# Altium PCB Mopq.PcbDoc (part 1 of 2)
Units mil, origin at the board's own origin, x right, y up, seen from the top; angles counter-clockwise.
Board outline 3099.85 x 1000 mil, 4 copper layers (TOP, SIG, VSS, BOT), stack 31.6 mil thick; 76 components, 92 nets, 477 pads, 380 vias.
Unrouted connection lines stored in the file: 14.
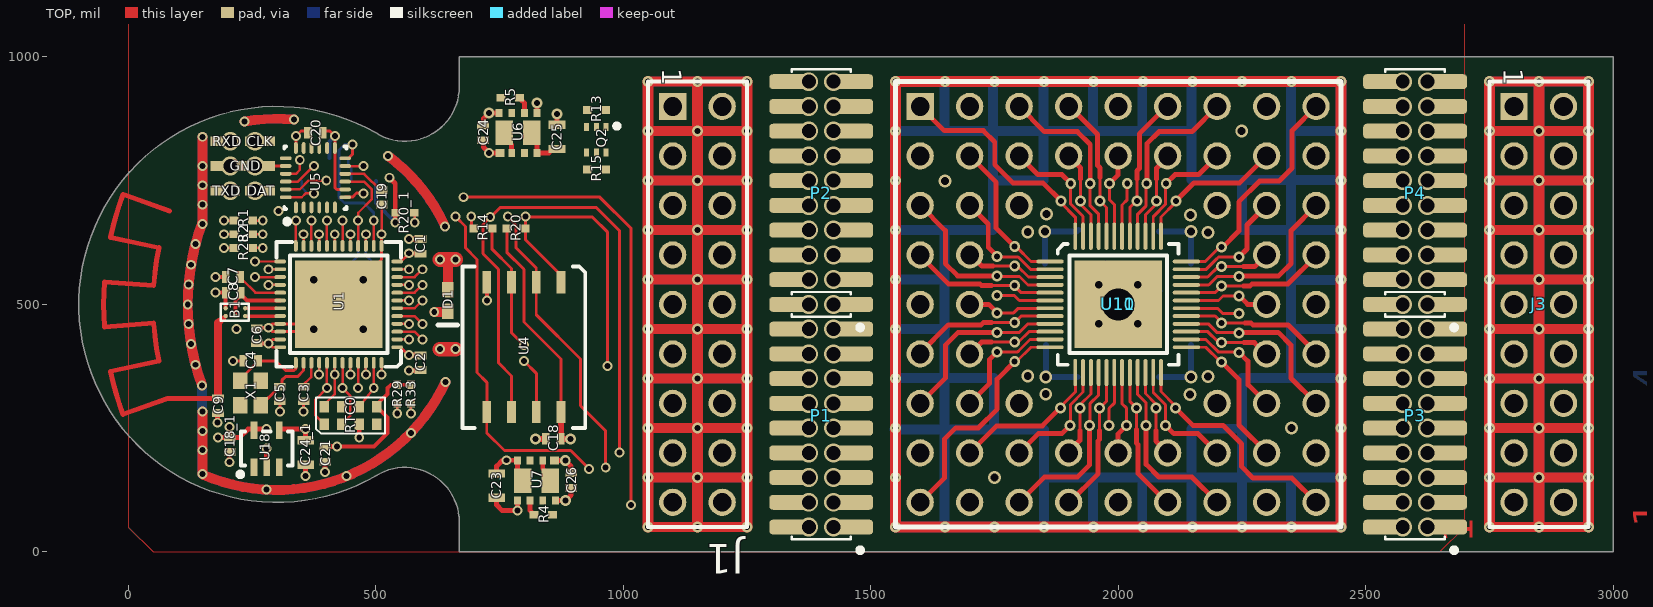
[diagram p0: TOP view]
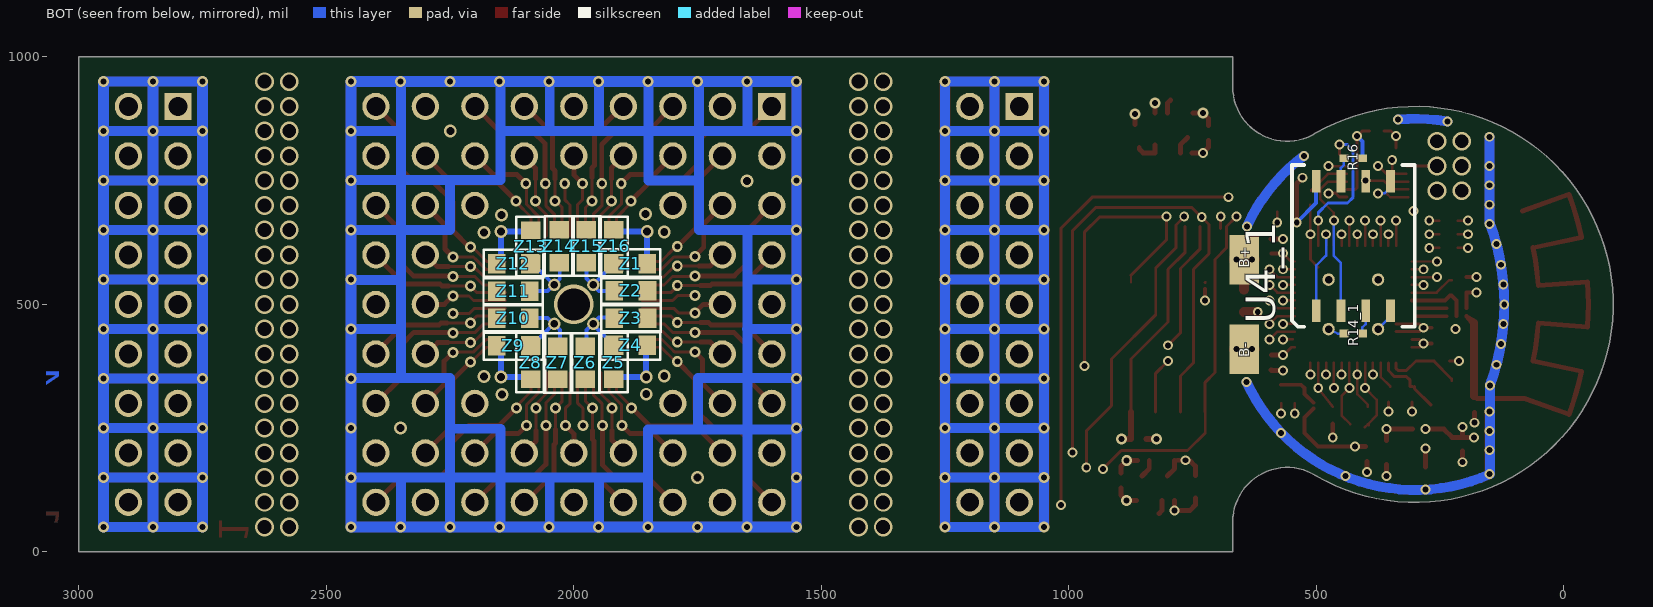
[diagram p1: BOT view, seen from below]
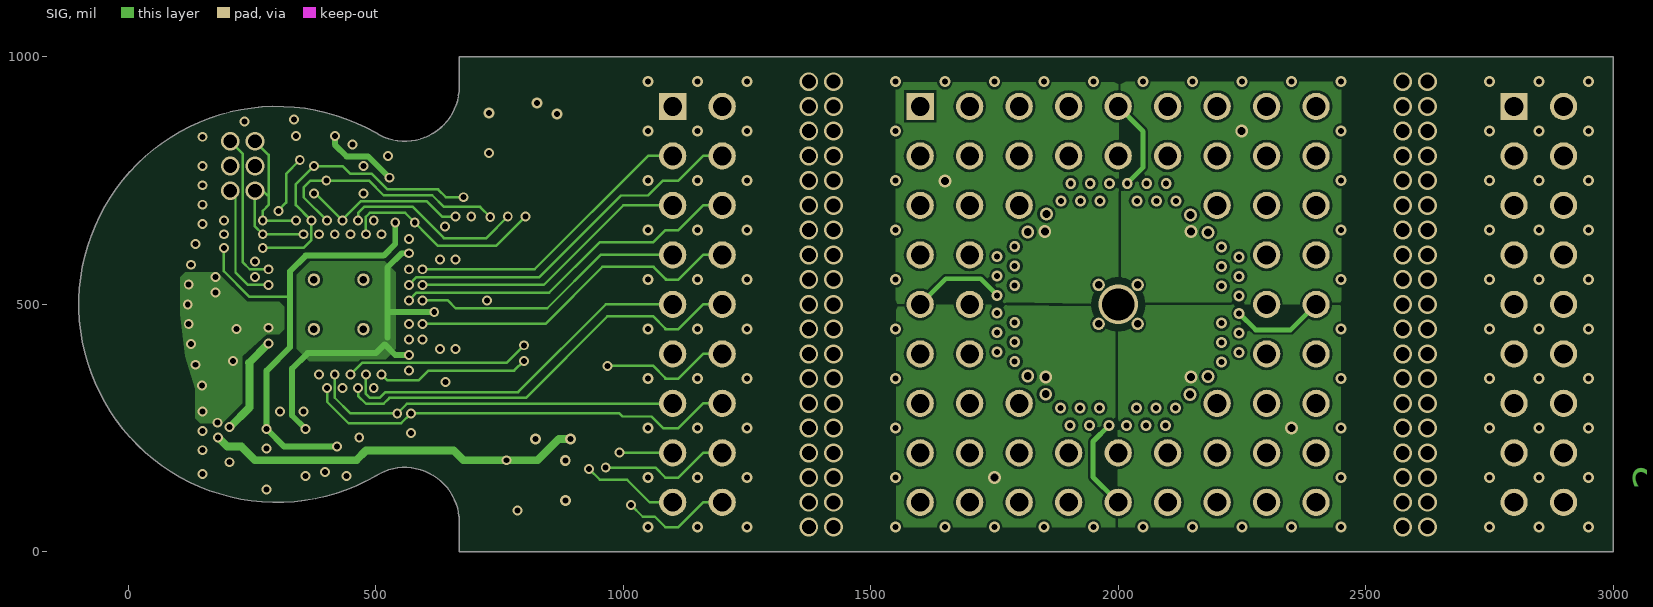
[diagram p2: SIG]
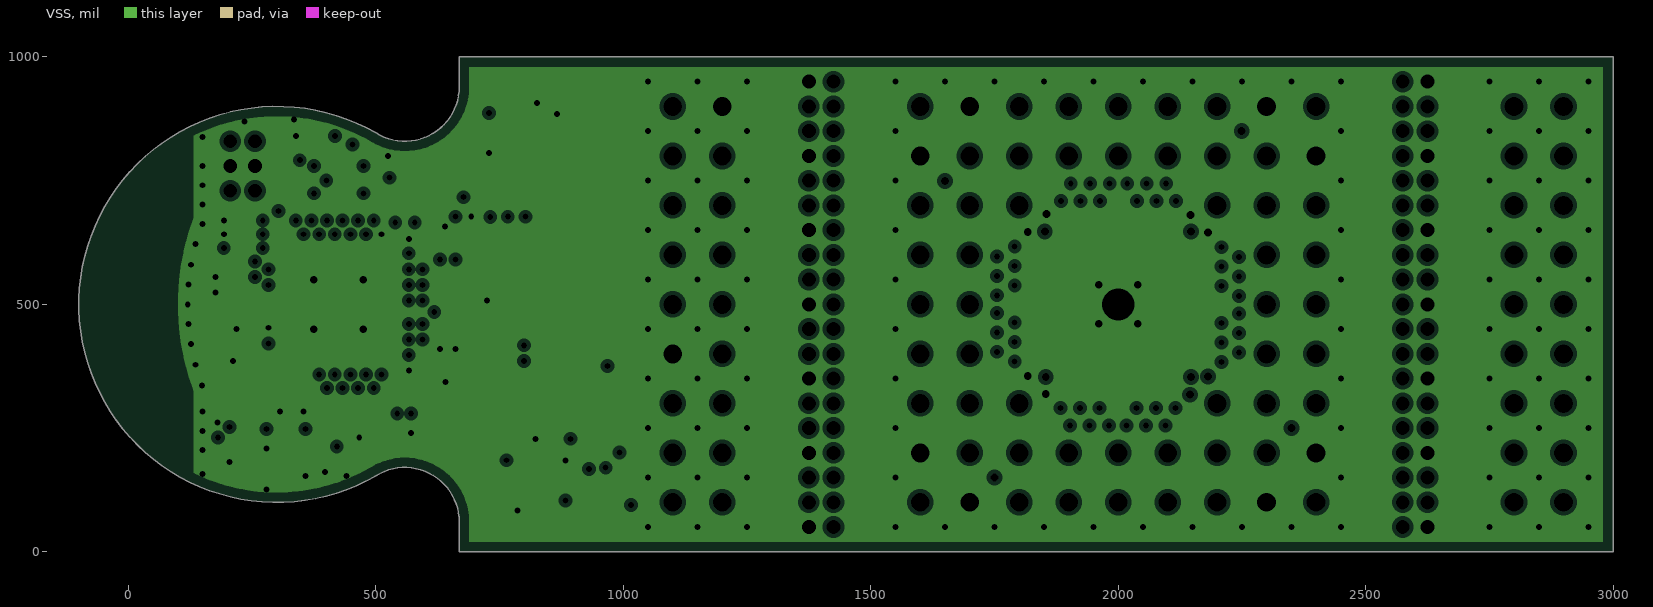
[diagram p3: VSS, clearances drawn from the general rule]
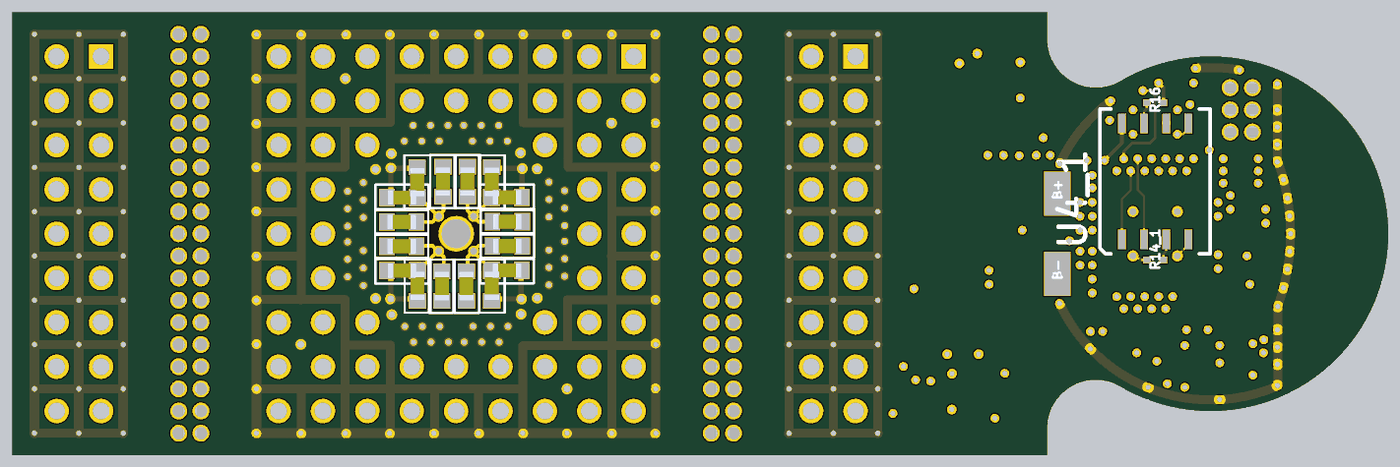
[diagram p5: 3D render of the assembled board from below, using the file's embedded part models]

## Layer stack, top to bottom
TOP: signal copper 1.4
Dielectric: prepreg 6, FR-4, Dk 4.8
SIG: signal copper 1.4
Dielectric: core 14, FR-4, Dk 4.8
VSS: plane copper 1.4, net GND
Dielectric: prepreg 6, FR-4, Dk 4.8
BOT: signal copper 1.4

## Board outline
668.62,0 668.62,60.01 ccw(c558.65,60.56) 500,153.59 cw(c300,500) 500,846.41 ccw(c558.65,939.44) 668.62,939.99 668.62,1000 3000,1000 3000,0

## Design rules (kind name [scope] priority, off if disabled: settings)
Clearance "Top Polygon" [(InPolygon)] p1: gap=5
Clearance [All] p2: gap=3
ComponentClearance [All] p1: gap=5 collisioncheckmode=3 verticalgap=5 showdistances=FALSE
FabricationTestPointUsage TestPointUsage [All] p1: valid=0 allowmultiple=FALSE
FabricationTestpoint Testpoint [All] p1: side=3 testpointundercomponent=TRUE minsize=40 maxsize=100 preferedsize=60 minholesize=0 maxholesize=40 preferedholesize=32 testpointgrid=1 allowsidetop=TRUE allowsidebottom=TRUE usegrid=TRUE gridtolerance=0.01
HoleSize [All] p1: absolutevalues=TRUE maxlimit=250 minlimit=3 maxpercent=80.000 minpercent=20.000
MinimumAnnularRing [All] p1: minimumring=2
PasteMaskExpansion [All] p1: expansion=-1
PlaneClearance [All] p1: clearance=8
PlaneConnect [All] p1: planeconnectstyle=Direct reliefexpansion=25 reliefentries=4 reliefconductorwidth=20 reliefairgap=10
PolygonConnect [All] p1: connectstyle=Direct reliefconductorwidth=15 reliefentries=4 polygonreliefangle="45 Angle"
RoutingLayers [All] p1: top layer_v5=TRUE mid layer 2_v5=FALSE bottom layer_v5=TRUE
RoutingVias [All] p1: holewidth=12 width=22 viastyle="Through Hole" minholewidth=3 minwidth=8 maxholewidth=65 maxwidth=100
SilkscreenOverComponentPads [All] p1: minsilkscreentomaskgap=10
SolderMaskExpansion [All] p1: expansion=3
Width [All] p1: maxlimit=200 minlimit=3 preferedwidth=10 toplayer_maxwidth=100 midlayer2_maxwidth=100 minimp=50.000000 maximp=50.000000 favimp=50.000000
19 further rules are at their usual default settings.

## Classes and differential pairs
component class Mopb: * ID1
component class Memory: C18 R14 R20 U4
component class "Power Conversion": C23 C24 C25 C26 Q2 R4 R5 R13 R15 U6 U7

## Components (designator, comment, footprint, x,y, rotation, side; value= is the part's Value field where it differs from the comment)
B1 "BAL-NRF02D3" BAL-ST-WLCSP 216.34,484.25 r180 top locked
B+ "5016" TP0875x050#1 651.97,578.15 r180 bottom
B- "5016" TP0875x050#2 651.97,417.91 r90 bottom
C1 "0.1u" CAP0402 590.35,617.13 r270 top
C2 "0.1u" CAP0402 590.35,381.89 r90 top
C3 "0.1u" CAP0402 354.13,318.9 r90 top
C4 "27p" CAP0402 247.09,385.83 r0 top
C5 "27p" CAP0402 306.14,318.9 r90 top
C6 "1000p" CAP0402 259.65,437.01 r270 top
C7 "0.047u" CAP0402 211.42,555.12 r0 top
C8 "2200p" CAP0402 212.4,523.62 r0 top
C9 "1.0p" CAP0402 181.1,295.28 r90 top
C18 "0.1u" CAP0402 858.27,228.35 r0 top
C18_1 "0.1u" CAP0402 204.72,216.54 r90 top (schematic designator C18)
C19 "0.1u" CAP0402 511.81,716.54 r90 top
C20 "10nF" CAP0402 377.95,846.46 r0 top
C21 "0.1u" CAP0402 397.64,196.85 r90 top
C23 "10u" CAP0603 744.09,133.86 r90 top
C24 "4.7u" CAP0402 716.54,846.46 r90 top
C24_1 "4.7u" CAP0603 358.27,200.79 r90 top (schematic designator C24)
C25 "22u" CAP0603 866.14,838.58 r270 top
C26 "4.7u" CAP0402 894.65,143.98 r270 top
CLK "5016" TP0875x050#3 265.91,829.53 r90 top
D1 "1PS79SB31" SOD-523 645.67,507.87 r90 top
DAT "5016" TP0875x050#4 255.91,729.53 r180 top
GND "5016" TP0875x050#5 230.91,779.53 r90 top
J1 "HDR2.54-2x9SM" HDR2.54-2X9 1150,500 r270 top locked
J3 "HDR2.54-2x9SM" HDR2.54-2X9 2850,500 r270 top locked (schematic designator J1)
P1 "HDR" HDR1.27-2X10-SMD-R 1400,275 r90 top
P2 "HDR" HDR1.27-2X10-SMD-R 1400,725 r90 top
P3 "HDR" HDR1.27-2X10-SMD-R 2600,275 r90 top
P4 "HDR" HDR1.27-2X10-SMD-R 2600,725 r90 top
Q2 "SSM6N42FE" ES6 945.79,832.68 r180 top
R1 "12k" RES0402 232.28,669.29 r180 top
R2 "12k" RES0402 232.28,641.73 r180 top
R4 "100k" RES0402 838.58,74.8 r0 top
R5 "100k" RES0402 771.65,917.32 r0 top
R13 "100k" RES0402 945.79,892.68 r0 top
R14 "100k" RES0402 716.54,653.54 r0 top
R14_1 "100k" RES0402 425.2,440.94 r180 bottom (schematic designator R14)
R15 "100k" RES0402 945.79,772.68 r0 top
R16 "100k" RES0402 425.2,795.28 r180 bottom
R20 "100k" RES0402 783.46,653.54 r0 top
R20_1 "100k" RES0402 559.06,685.04 r0 top (schematic designator R20)
R28 "100k" RES0402 232.28,614.17 r180 top
R29 "100k" RES0402 543.31,318.9 r90 top
R33 "100k" RES0402 570.87,318.9 r90 top
RTC0 "AB-RTCMC-32.768kHz-AIGZ" 8-CLCC 448.82,275.59 r0 top
RXD "5016" TP0875x050#3 195.91,829.53 r90 top
TXD "5016" TP0875x050#3 195.91,729.53 r90 top
U1 "nRF51822-QF" VQFN40P600X600X100-48 425,500 r180 top locked
U4 "MX25U12835F" "WSON 8L" 799.21,413.39 r270 top locked
U4_1 "MX25U12835F" "WSON 8L" 425,618.11 r90 bottom (schematic designator U4)
U5 "InvenSense MPU-6500" QFN-24 377.95,755.9 r90 top locked
U6 "XCL209B303DR" USP-10B03 787.4,846.46 r90 top
U7 "XCL209B183DR" USP-10B03 824.57,143.9 r270 top
U10 "EM351" PGA60x9 1600,900 r0 top locked
U11 "EM351" TQFP40P800X800X120-48N 2000,500 r0 top
U18 "TPS79718" SOT65P212X110-5N 279.53,208.66 r90 top locked
X1 "ILCX19" ILCX19 211.65,362.2 r270 top
Z1 "Inductor" 603 1885.07,582.17 r0 bottom
Z2 "Inductor" 603 1884.6,527.17 r0 bottom
Z3 "Inductor" 603 1884.6,472.17 r0 bottom
Z4 "Inductor" 603 1885.07,417.17 r0 bottom
Z5 "Inductor" 603 1919.6,382.17 r90 bottom
Z6 "Inductor" 603 1977.06,381.7 r90 bottom
Z7 "Inductor" 603 2032.06,381.7 r90 bottom
Z8 "Inductor" 603 2087.06,382.17 r90 bottom
Z9 "Inductor" 603 2122.06,416.7 r180 bottom
Z10 "Inductor" 603 2122.54,471.7 r180 bottom
Z11 "Inductor" 603 2122.54,526.7 r180 bottom
Z12 "Inductor" 603 2122.06,581.7 r180 bottom
Z13 "Inductor" 603 2087.54,616.7 r270 bottom
Z14 "Inductor" 603 2029.6,617.65 r270 bottom
Z15 "Inductor" 603 1974.6,617.65 r270 bottom
Z16 "Inductor" 603 1919.6,617.17 r270 bottom

## Footprints (in the part's own frame and the unit in brackets; to place one, negate y for a bottom-side part, rotate by r counter-clockwise, add the part's x,y. Pads: shape width x height; smd on the part's side, far side on the other; paste and mask are expansions set on the pad)
8-CLCC [mm] "8 lead CLCC package, 2.3 x 1.5mm"
  rect 0.5x0.6 smd: 1(-1.35,-0.45) 2(-0.45,-0.45) 3(0.45,-0.45) 4(1.35,-0.45) 5(1.35,0.45) 6(0.45,0.45) 7(-0.45,0.45) 8(-1.35,0.45)
  silkscreen extent -1.78,-0.92 1.78,0.92, body extent -1.6,-0.75 1.6,0.75, height 0.8
603 [mm]
  rect 0.9x1 smd: 1(-0.85,0) 2(0.85,0)
  silkscreen extent -1.52,-0.74 1.52,0.74, body extent -0.81,-0.41 0.81,0.41, height 0.47
BAL-ST-WLCSP [mm]
  round 0.22 smd mask+0.05: A1(0.5,0.2) A2(0,0.2) A3(-0.5,0.2) B1(0.5,-0.2) B3(-0.5,-0.2)
  TOP pour cut-out: -0.697,-0.43 0.756,-0.43 0.756,0.44 -0.697,0.44
  silkscreen extent -0.69,-0.43 0.76,0.43, body extent -0.7,-0.43 0.76,0.43, height 0.63
CAP0402 [mm] "Chip Capacitor, 2-Leads, Body 0402 / 0.10x0.50mm, IPC High Density"
  rect 0.4x0.6 smd: 1(-0.375,0) 2(0.375,0)
  body extent -0.53,-0.28 0.53,0.28, height 0.55
CAP0603 [mm] "Chip Capacitor, 2-Leads, Body 0603 / 1.60x0.8mm, IPC High Density"
  rect 0.425x0.85 smd: 1(-0.625,0) 2(0.625,0)
  body extent -0.8,-0.4 0.8,0.4, height 0.8
ES6 [mm] "SOT-563 6-pin 1.6x1.6x0.55mm"
  rect 0.25x0.4 smd: 1(-0.5,-0.65) 2(0,-0.65) 3(0.5,-0.65) 4(0.5,0.65) 5(0,0.65) 6(-0.5,0.65)
  silkscreen extent -1.16,-0.81 -0.94,-0.59, body extent -0.8,-0.6 0.8,0.6, height 0.55
HDR1.27-2X10-SMD-R [mil] "CONN, HDR, 20POS, 2ROW, 50MIL, POLARIZED, SMD, RECEPTACLE"
  rrect50% 30x90 smd: 1(-225,-60) 2(-225,60) 3(-175,-60) 4(-175,60) 5(-125,-60) 6(-125,60) 7(-75,-60) 8(-75,60) 9(-25,-60) 10(-25,60) 11(25,-60) 12(25,60) 13(75,-60) 14(75,60) 15(125,-60) 16(125,60) 17(175,-60) 18(175,60) 19(225,-60) 20(225,60)
  silkscreen extent -277,-84 250,60
HDR2.54-2X9 [mil] "Connector; Header; 2x9 Position"
  rect 55x55 hole 38: 1(-400,-50)
  round 55 hole 38: 2(-400,50) 3(-300,-50) 4(-300,50) 5(-200,-50) 6(-200,50) 7(-100,-50) 8(-100,50) 9(0,-50) 10(0,50) 11(100,-50) 12(100,50) 13(200,-50) 14(200,50) 15(300,-50) 16(300,50) 17(400,-50) 18(400,50)
  silkscreen extent -450,-100 450,100
ILCX19 [mm] "ILSI ILCX19 Crystal Oscillator 2.0 x 1.6 x 0.45mm"
  rect 0.85x0.75 smd: 1(0.425,0.375) 2(1.675,0.375) 3(1.675,1.425) 4(0.425,1.425)
  body extent 0.05,0.1 2.05,1.7, height 0.45
PGA60x9 [mil]
  rect 55x55 hole 38: A1(0,0)
  round 55 hole 38: A2(100,0) A3(200,0) A4(300,0) A5(400,0) A6(500,0) A7(600,0) A8(700,0) A9(800,0) B1(0,-100) B2(100,-100) B3(200,-100) B4(300,-100) B5(400,-100) B6(500,-100) B7(600,-100) B8(700,-100) B9(800,-100) C1(0,-200) C2(100,-200) C3(200,-200) C7(600,-200) C8(700,-200) C9(800,-200) D1(0,-300) D2(100,-300) D8(700,-300) D9(800,-300) E1(0,-400) E2(100,-400) E8(700,-400) E9(800,-400) F1(0,-500) F2(100,-500) F8(700,-500) F9(800,-500) G1(0,-600) G2(100,-600) G3(200,-600) G7(600,-600) G8(700,-600) G9(800,-600) H1(0,-700) H2(100,-700) H3(200,-700) H4(300,-700) H5(400,-700) H6(500,-700) H7(600,-700) H8(700,-700) H9(800,-700) J1(0,-800) J2(100,-800) J3(200,-800) J4(300,-800) J5(400,-800) J6(500,-800) J7(600,-800) J8(700,-800) J9(800,-800)
  silkscreen extent -50,-850 850,50
QFN-24 [mm]
  oval 0.6x0.2 smd: 1(-1.525,1) 2(-1.525,0.6) 3(-1.525,0.2) 4(-1.525,-0.2) 5(-1.525,-0.6) 6(-1.525,-1) 13(1.525,-1) 14(1.525,-0.6) 15(1.525,-0.2) 16(1.525,0.2) 17(1.525,0.6) 18(1.525,1)
  oval 0.2x0.6 smd: 7(-1,-1.525) 8(-0.6,-1.525) 9(-0.2,-1.525) 10(0.2,-1.525) 11(0.6,-1.525) 12(1,-1.525) 19(1,1.525) 20(0.6,1.525) 21(0.2,1.525) 22(-0.2,1.525) 23(-0.6,1.525) 24(-1,1.525)
  TOP pour cut-out: -1.35,1.35 -1.35,-1.35 1.35,-1.35 1.35,1.35
  silkscreen extent -2.37,-1.6 1.6,1.6, body extent -1.45,-1.45 1.45,1.45, height 0.95
RES0402 [mm] "Chip resistor 0402 high density"
  rect 0.45x0.4 smd: 1(-0.475,0) 2(0.475,0)
  body extent -0.61,-0.2 0.6,0.2, height 0.5
SOD-523 [mm] "Diode small package"
  rect 0.8x0.6 smd: 1(0.55,0) 2(-0.55,0)
  silkscreen extent -1.25,-0.5 -1.25,0.5, body extent -1.12,-0.6 1.12,0.6, height 0.65
SOT65P212X110-5N [mm] "SOT23, 5-Leads, Body 2.3x2.3mm (max), Pitch 0.65mm, IPC Medium Density"
  rect 0.9x0.35 smd: 1(-0.95,0.65) 2(-0.95,0) 3(-0.95,-0.65) 4(0.95,-0.65) 5(0.95,0.65)
  silkscreen extent -1.45,-1.33 0.88,1.47, body extent -0.67,-1.12 0.67,1.13, height 1.1
TP0875x050#1 [mm] "Test Pad 0.875x0.50mm"
  rect 1.524x2.54 smd: 1(0.16,0.315)
TP0875x050#2 [mm] "Test Pad 0.875x0.50mm"
  rect 2.54x1.524 smd: 1(-0.215,-0.16)
TP0875x050#3 [mm] "Test Pad 0.875x0.50mm"
  rect 0.508x1.524 smd: 1(0,0)
TP0875x050#4 [mm] "Test Pad 0.875x0.50mm"
  rect 1.524x0.508 smd: 1(-0.254,0)
TP0875x050#5 [mm] "Test Pad 0.875x0.50mm"
  rect 0.508x3.302 smd: 1(0,0)
TQFP40P800X800X120-48N [mm]
  round 0.635 hole 0.381: 0(-1,-1) 0(-1,1) 0(1,-1) 0(1,1)
  rect 4.5x4.5 smd: 0(0,0)
  oval 1.4x0.2 smd: 1(-3.5,2.2) 2(-3.5,1.8) 3(-3.5,1.4) 4(-3.5,1) 5(-3.5,0.6) 6(-3.5,0.2) 7(-3.5,-0.2) 8(-3.5,-0.6) 9(-3.5,-1) 10(-3.5,-1.4) 11(-3.5,-1.8) 12(-3.5,-2.2) 25(3.5,-2.2) 26(3.5,-1.8) 27(3.5,-1.4) 28(3.5,-1) 29(3.5,-0.6) 30(3.5,-0.2) 31(3.5,0.2) 32(3.5,0.6) 33(3.5,1) 34(3.5,1.4) 35(3.5,1.8) 36(3.5,2.2)
  oval 0.2x1.4 smd: 13(-2.2,-3.5) 14(-1.8,-3.5) 15(-1.4,-3.5) 16(-1,-3.5) 17(-0.6,-3.5) 18(-0.2,-3.5) 19(0.2,-3.5) 20(0.6,-3.5) 21(1,-3.5) 22(1.4,-3.5) 23(1.8,-3.5) 24(2.2,-3.5) 37(2.2,3.5) 38(1.8,3.5) 39(1.4,3.5) 40(1,3.5) 41(0.6,3.5) 42(0.2,3.5) 43(-0.2,3.5) 44(-0.6,3.5) 45(-1,3.5) 46(-1.4,3.5) 47(-1.8,3.5) 48(-2.2,3.5)
  silkscreen extent -3.1,-3.1 3.1,3.1
USP-10B03 [mm] "10-pin QFN 2.5 x2.15x1.0mm"
  rect 0.4x0.45 smd mask+0.08: 1(-1.025,0.925)
  rect 0.4x0.35 smd mask+0.08: 2(-1.025,0.325) 3(-1.025,-0.325) 4(-1.025,-0.975) 5(1.025,-0.975) 6(1.025,-0.325) 7(1.025,0.325) 8(1.025,0.975)
  rect 1.25x0.9 smd mask+0.08: 9(0,0.7) 10(0,-0.7)
  body extent -1.1,-1.28 1.1,1.27, height 1.05
VQFN40P600X600X100-48 [mm]
  round 0.635 hole 0.381: 0(-1.27,1.27) 0(-1.27,-1.27) 0(1.27,1.27) 0(1.27,-1.27)
  rect 4.5x4.5 smd: 0(0,0)
  oval 0.6x0.2 smd: 1(-3,2.2) 2(-3,1.8) 3(-3,1.4) 4(-3,1) 5(-3,0.6) 6(-3,0.2) 7(-3,-0.2) 8(-3,-0.6) 9(-3,-1) 10(-3,-1.4) 11(-3,-1.8) 12(-3,-2.2) 25(3,-2.2) 26(3,-1.8) 27(3,-1.4) 28(3,-1) 29(3,-0.6) 30(3,-0.2) 31(3,0.2) 32(3,0.6) 33(3,1) 34(3,1.4) 35(3,1.8) 36(3,2.2)
  oval 0.2x0.6 smd: 13(-2.2,-3) 14(-1.8,-3) 15(-1.4,-3) 16(-1,-3) 17(-0.6,-3) 18(-0.2,-3) 19(0.2,-3) 20(0.6,-3) 21(1,-3) 22(1.4,-3) 23(1.8,-3) 24(2.2,-3) 37(2.2,3) 38(1.8,3) 39(1.4,3) 40(1,3) 41(0.6,3) 42(0.2,3) 43(-0.2,3) 44(-0.6,3) 45(-1,3) 46(-1.4,3) 47(-1.8,3) 48(-2.2,3)
  silkscreen extent -3.2,-3.2 3.2,3.2
"WSON 8L" [mm] "WSON 8L 8x6x0.8mm"
  rect 1.15x0.45 smd: 1(-3.325,1.905) 2(-3.325,0.635) 3(-3.325,-0.635) 4(-3.325,-1.905) 5(3.325,-1.905) 6(3.325,-0.635) 7(3.325,0.635) 8(3.325,1.905)
  silkscreen extent -4.15,-3.15 4.15,3.15, body extent -4,-3 4,3, height 0.8

## Part data
B1: library part BAL-ST-5pin_DC-Flip, "50 ohm balun transformer for 2.45GHz ISM"
B+ B- CLK DAT GND RXD TXD: "Single-pad test point"
C1 C2 C3 C19 C21: library part C_0.1u_10_10_X5R_0201, "Chip capacitor"
C4 C5: library part C_27p_5_50_C0G_0201, "Chip capacitor"
C6: library part C_1000p_10_25_X7R_0201, "Chip capacitor"
C7: library part C_0.047u_10_16_X7R_0402, "Chip capacitor"
C8 C9: library part C_2200p_5_16_STD_0402, "Chip capacitor"
C18 C18_1: library part C_0.1u_10_6.3_X5R_0201, "Chip capacitor"
C20: library part CAP0201, "Chip capacitor"
C23: library part C_10u_10_6.3_X5R_0603, "Chip capacitor"
C24 C24_1 C26: library part C_4.7u_10_10_JB_0402, "Chip capacitor"
C25: library part C_22u_10_20_JB_0603, "Chip capacitor"
D1: "Schottky diode, 30V 200mA"
Q2: "Toshiba Dual N-Channel MOSFET 1.5v drive 20V 800ma"
R1 R2: library part R_12k_0.5_0.063_0402, "Chip Resistor"
R4 R5 R13 R14 R14_1 R15 R16 R20 R20_1 R28 R29 R33: library part R_100k_5_0.05_0201, "Chip Resistor"
RTC0: "Abracon I2C RTC w/ integrated XO"
U1: library part nRF51822_QF, "Multi-protocol Bluetooth Low Energy and 2.4GHz proprietary system-on-chip"
U4 U4_1: "Macronix MX25U12835F SPI NOR Flash"
U5: library part MPU-6500, "InvenSense MPU-6500 6-axis accelerometer and gyroscope"
U6 U7: library part XCL208, "Torex micro DC-DC Converter"
U10: library part EM350
U18: library part TPS79718DCK, "LDO 1.8V SC70-5"
X1: "ILSI ILCX19 Crystal Oscillator"
Z1 Z2 Z3 Z4 Z5 Z6 Z7 Z8 Z9 Z10 Z11 Z12 Z13 Z14 Z15 Z16: library part 210-00031

## Via types
v1: diameter 22, hole 12, TOP to BOT, tented both sides, 144 vias
v2: diameter 20, hole 12, TOP to BOT, 130 vias
v3: diameter 38, hole 28, TOP to BOT, 82 vias
v4: diameter 26, hole 16, TOP to BOT, tented both sides, 16 vias
v5: diameter 22, hole 12, TOP to BOT, 7 vias
v6: diameter 80, hole 65, TOP to BOT, 1 vias

## Nets (pads, with @x,y where several pads share a name; then routed paths per layer and width w, separated by ;. In a path a pad name is that pad's centre, name@x,y a point inside that pad or via, vN(x,y) a via of type N, cw(c..) or ccw(c..) an arc to the next point about the centre after c; other vN are vias at no path point)
1V8: C6.2 C18.2 C18_1.2 C23.2 R20.1 U1.35 U1.36 U4.8 U7.4 U7.10 | length 1690.4
  TOP w6: U1.36@306.89,413.39 291.14,413.39 v2(283.27,421.26) 291.14,429.13 U1.35@306.89,429.13 ; R20.1@764.76,657.48 764.76,605.32 799.21,570.87 799.21,464.57 874.21,389.57 U4.8@874.21,282.48
  TOP w7.87: C6.2@266.54,421.26 v2(283.27,421.26)
  TOP w10: v2(181.1,231.3) 225.39,231.3 ; C18_1.2@204.72,235.24 v2(204.72,251.97) ; C23.2@744.09,154.53 744.09,173.23 755.91,185.04 v2(763.78,185.04) U7.4@779.92,185.04 ; U7.4@786.18,184.25 786.18,167.83 U7.10@800.94,153.07
  TOP w12: C18.2@874.02,228.35 C18.2@874.21,228.35 ; U4.8@874.21,282.48 C18.2@874.21,228.35 ; v5(893.7,228.35) C18.2@874.21,228.35
  SIG w16: v2(181.1,231.3) 199.8,212.6 228.35,212.6 255.91,185.04 460.63,185.04 480.32,204.72 657.48,204.72 677.17,185.04 v2(763.78,185.04) 826.77,185.04 870.08,228.35 v5(893.7,228.35) ; v2(204.72,251.97) 244.59,291.83 244.59,382.09 ; 244.09,382.09 v2(283.27,421.26)
  other v4: 1851.77,647.24 1650,749.61
1V8_EN: R4.1 U1.3 U7.6 | length 86.4
  TOP w5: U1.3@543.11,444.88 578.54,444.88 v2(594.29,429.13)
  TOP w10: U7.6@811.77,103.54 811.77,83.27 R4.1@817.76,77.28
3V3: C25.2 U6.4 U6.10 | length 54.4
  TOP w10: U6.10@825.79,822.52 U6.4@825.79,806.1 849.8,806.1 857.6,813.9 C25.2@857.6,816.85
  other v4: 1750,150 1853.74,352.95
3V3_EN: R5.2 U1.11 U6.6 | length 52.4
  TOP w5: U1.11@543.11,570.87 v2(566.73,570.87)
  TOP w10: R5.2@794.21,913.07 800.2,907.09 U6.6@800.2,886.81
AD_ENABLE: 
AD_GATE: 
ADS_CTL1: 
ADS_CTL2: 
ADS_MOSI: 
ADS_SCLK: 
AIN0: J1.10 U1.45 | length 912.7
  TOP w5: v2(464.37,330.71) U1.45@464.37,381.89
  SIG w5: v2(464.37,330.71) 464.37,315.16 480.31,299.21 515.75,299.21 527.56,311.02 803.15,311.02 967.76,475.63 1060.91,475.63 1084.92,451.61 ; 1084.92,450 1111.42,450 1161.42,500 J1.10@1200,500
AIN1: J1.9 U1.46 | length 804.3
  TOP w5: v2(480.12,358.27) U1.46@480.12,381.89
  SIG w5: v2(480.12,358.27) 480.12,319.09 488.19,311.02 507.87,311.02 519.68,322.83 787.4,322.83 964.57,500 J1.9@1100,500 1060,500
AIN2: J1.8 U1.5 | length 741.7
  TOP w5: U1.5@543.11,476.38 578.54,476.38 v2(594.29,460.63)
  SIG w5: v2(594.29,460.63) 842.52,460.63 957.52,575.63 1061.42,575.63 1085.43,551.61 ; 1085.43,550 1111.42,550 1161.42,600 J1.8@1200,600
AIN3: J1.7 U1.6 | length 614.6
  TOP w5: U1.6@543.11,492.13 578.54,492.13 v2(594.29,507.87)
  SIG w5: v2(594.29,507.87) 645.67,507.87 661.42,492.13 846.46,492.13 954.33,600 J1.7@1100,600
AIN4: J1.6 U1.7 | length 736.5
  TOP w5: U1.7@543.11,507.87 v2(566.73,507.87)
  SIG w5: v2(566.73,507.87) 582.48,523.62 850.39,523.62 952.76,625.98 1060.98,625.98 1085,650 1111.42,650 1161.42,700 J1.6@1200,700
AIN5: J1.5 U1.8 | length 809.4
  TOP w5: U1.8@543.11,523.62 578.54,523.62 v2(594.29,539.37)
  SIG w5: 688.78,539.37 v2(594.29,539.37) 839.37,539.37 1000,700 J1.5@1100,700 1015,700
AIN6: J1.4 U1.9 | length 859.3
  TOP w5: U1.9@543.11,539.37 v2(566.73,539.37)
  SIG w5: v2(566.73,539.37) 582.48,555.12 ; 676.97,555.12 582.48,555.12 ; J1.4@1200,800 1161.42,800 1111.42,750 1080,750 1050,720 995.59,720 830.71,555.12 582.48,555.12
AIN7: J1.3 U1.10 | length 787.8
  TOP w5: U1.10@543.11,555.12 578.54,555.12 v2(594.29,570.87)
  SIG w5: 688.78,570.87 v2(594.29,570.87) 820.87,570.87 1050,800 J1.3@1100,800 1065,800
ANT1: B1.B3 U1.31 | length 63
  TOP w7: B1.B3@236.02,492.13 U1.31@299.02,492.13
ANT2: B1.A3 U1.32 | length 63
  TOP w7: B1.A3@236.02,476.38 U1.32@299.02,476.38
AUX_SCL: U5.7 | length 40.5
  TOP w6: U5.7@437.99,716.53 452.76,716.53 461.22,725 v2@475,725
  other v2: 475,724.41
AUX_SDA: U5.21 | length 171
  TOP w5: U5.21@317.91,763.78 338.58,763.78 346.46,771.65 v2(346.46,791.34)
  SIG w5: v2@303.15,689.76 318.9,705.51 318.9,763.78 v2(346.46,791.34)
  other v2: 303.15,688.98
BATT: 
BGND: 
BLE_ANT: B1.A1 C9.2 | length 1300
  TOP w8: 181.47,467.94 B1.A1@196.65,476.38 185.83,462.6
  TOP w10: 51.31,462.02 -48.42,454.66 cw(c600,500) -48.42,545.34 51.31,537.98 ; 51.34,461.63 ccw(c600,500) 62.02,385.65 ; 51.34,538.37 cw(c600,500) 62.02,614.35 ; 62.05,385.49 -35.8,364.86 ccw(c600,500) -10.8,277.69 79.11,309.98 C9.2@174.93,309.98 ; 62.05,614.51 -35.8,635.14 cw(c600,500) -10.8,722.31 83.31,688.51
  TOP w16: C9.2@181.1,314.96 181.1,462.83
BLE_GND: 
DCC: U1.2 | length 19.7
  TOP w5: U1.2@547.05,429.13 v2(566.73,429.13)
DEC1: C3.2 U1.39 | length 56.3
  TOP w5: C3.2@350.2,333.66 369.63,353.09 ; 369.88,353.09 U1.39@369.88,381.89
DEC2: C7.2 U1.29 | length 91.3
  TOP w5: C7.2@226.18,549.21 231.1,549.21 256.69,523.62 U1.29@306.89,523.62
FLASH_CS: J1.12 R20.2 R20_1.2 U1.15 U4.1 U4_1.1 | length 1483.8
  TOP w5: U1.15@480.12,618.11 v2(480.12,641.73) ; U4.1@874.21,544.29 U4.1@874.21,558.86
  TOP w6: v2(578.74,665.35) R20_1.2@578.74,687.01 ; v2@802.17,676.67 937.5,676.67 968.5,645.67 v2@968.5,374.02 ; v2(802.17,677.17) 802.17,630.91 U4.1@874.21,558.86
  SIG w5: v2(480.12,641.73) 480.12,676.97 488.19,685.04 559.06,685.04 625.98,618.11 743.11,618.11 v2(802.17,677.17) ; v2(968.5,375.63) 1060.91,375.63 1084.92,351.61 ; 1084.92,350 1111.42,350 1161.42,400 J1.12@1200,400
  BOT w5: v2(480.12,641.73) 480.12,598.62 500,578.74 U4_1.1@500,500
FLASH_CS#: 
FLASH_NCS: 
FRST: R16.1 U1.48 U4.7 U4_1.7 | length 494.6
  TOP w5: v2(511.61,358.27) U1.48@511.61,381.89
  TOP w6: v2(799.21,385.83) 824.41,360.63 U4.7@824.41,282.68
  SIG w5: v2@511.81,358.27 523.62,346.46 586.61,346.46 606.3,366.14 779.53,366.14 v2(799.21,385.83)
  BOT w5: R16.1@443.9,795.28 443.9,781.69 450,775.59 U4_1.7@450,749.02
FSYNC: U5.11 | length 38.4
  TOP w5: U5.11@437.99,779.53 v2@476.38,779.53
  other v2: 475,779.53
FWPT: R14.2 R14_1.2 U1.44 U4.3 U4_1.3 | length 717
  TOP w5: v2(448.62,358.27) U1.44@448.62,381.89
  TOP w6: R14.2@735.24,657.48 735.24,611.22 774.21,572.24 U4.3@774.21,544.29 ; U4.3@774.02,544.09 774.02,442.52 v2(799.21,417.32)
  SIG w5: v2(448.62,358.27) 472.24,381.89 763.78,381.89 v2@801.18,419.29
  BOT w5: U4_1.3@400,487.2 400,460.24 406.5,453.74 R14_1.2@406.5,440.94
GAUGE_INT: 
GAUGE_SCL: 
GAUGE_SDA: 
GND: B1.B1 B-.1 C1.1 C2.1 C3.1 C4.1 C5.1 C6.1 C7.1 C8.1 C9.1 C18.1 C18_1.1 C19.1 C20.1 C21.1 C23.1 C24.1 C24_1.1 C25.1 C26.1 GND.1 J1.2 J1.11 Q2.1 Q2.4 R1.2 R2.2 R4.2 R5.1 R13.1 R14.1 R14_1.1 R15.1 RTC0.3 U1.0 U1.13 U1.33 U1.34 U4.4 U4_1.4 U5.18 U5.20 U6.1 U6.5 U7.1 U7.5 U10.A2 U10.A8 U10.B1 U10.B9 U10.H1 U10.H9 U10.J2 U10.J8 U11.0 U18.2 | length 36809.7
  TOP w5: v2(192.91,641.73) R2.2@213.58,641.73 ; v2(192.91,669.29) R1.2@213.58,669.29 ; v2@511.87,641.98 C19.1@511.87,701.77
  TOP w6: v2(211.65,385.83) C4.1@230.83,385.83 ; v3(255.91,779.53) U5.20@317.91,779.53 ; v2(306.14,283.46) C5.1@306.14,302.64 ; U1.0@338.39,444.88 U1.34@306.89,444.88 291.14,444.88 v2(283.27,452.76) 291.14,460.63 U1.33@306.89,460.63 U1.0@338.39,460.63 ; U5.18@338.58,815.94 338.58,840.05 348.92,850.39 C20.1@363.19,850.39 ; v2(354.33,283.46) C3.1@354.33,302.64 ; U1.0@496.18,575 511.61,590.43 U1.13@511.61,618.11 v2(511.61,641.73) v2@511.87,641.98 ; R14.1@692.91,653.54 v2(692.91,677.17) ; U4.4@724.21,544.29 U4.4@724.41,544.49
  TOP w7.87: C6.1@266.54,452.76 v2(283.27,452.76)
  TOP w8: v2(175.98,523.62) 196.65,523.62 B1.B1@196.65,492.13 ; v2(175.98,555.12) C7.1@196.65,555.12 ; v2(724.41,507.87) U4.4@724.41,531.5
  TOP w10: v2(180.16,260.9) C9.1@180.16,281.57 ; v2(204.72,181.1) C18_1.1@204.72,203.74 ; U18.2@279.53,171.26 v2(279.53,208.66) ; v2(358.27,153.54) C24_1.1@358.27,176.18 ; v2(397.64,161.42) C21.1@397.64,182.09 ; v2(466.54,231.3) RTC0.3@466.54,257.87 ; v2(566.73,366.14) C2.1@590.35,366.14 ; v2(566.73,631.89) C1.1@591.34,631.89 ; C2.1@590.35,367.13 C2.1@591.34,367.13 ; C24.1@717.32,831.61 717.32,817.87 v2(729.09,806.1) U6.1@750.98,806.1 ; C23.1@744.09,109.25 744.09,94.49 754.72,83.86 v2(786.18,83.86) U7.5@786.18,103.54 ; U6.5@825.79,886.81 v5(825.79,906.5) ; U7.1@860.98,184.25 v5(882.87,184.25) 894.65,172.48 C26.1@894.65,158.74 ; C25.1@866.14,863.19 v5(866.14,884.37)
  TOP w12: v5(822.83,228.35) C18.1@842.52,228.35
  TOP w20: v2(148.95,335.83) cw(c600,500) v2@148.95,664.17 ; v2(149.61,157.48) v2(149.61,283.46) ; v2@150,664.17 v2(149.96,838.58) ; v2@152.28,155.32 ccw(c300,500) v2(640.58,343.05) ; v2(234.88,869.31) cw(c300,500) v2(334.59,873.41) ; v2(525,800) cw(c300,500) v2@638.35,661.68 ; v1@1050.7,50 v1@1249.3,50 ; v1@1050.7,150 v1@1249.3,150 ; v1@1050.7,250 v1@1249.3,250 ; v1@1050.7,350 v1@1249.3,350 ; v1@1050.7,450 v1@1249.3,450 ; v1@1050.7,550 v1@1249.3,550 ; v1@1050.7,650 v1@1249.3,650 ; v1@1050.7,750 v1@1249.3,750 ; v1@1050.7,850 v1@1249.3,850 ; v1@1050.7,950 v1@1249.3,950 ; v1@2750.7,50 v1@2949.3,50 ; v1@2750.7,150 v1@2949.3,150 ; v1@2750.7,250 v1@2949.3,250 ; v1@2750.7,350 v1@2949.3,350 ; v1@2750.7,450 v1@2949.3,450 ; v1@2750.7,550 v1@2949.3,550 ; v1@2750.7,650 v1@2949.3,650 ; v1@2750.7,750 v1@2949.3,750 ; v1@2750.7,850 v1@2949.3,850 ; v1@2750.7,950 v1@2949.3,950
  TOP w22: v1(1050,50) v1(1050,950) ; v1(1150,50) v1(1150,950) ; v1(1250,50) v1(1250,950) ; v1(2750,50) v1(2750,950) ; v1(2850,50) v1(2850,950) ; v1(2950,50) v1(2950,950) ; v1(1550,50) v1(1550,950) v1(2450,950) v1(2450,50) v1(1550,50)
  TOP w30: v2(629.92,409.45) v2(661.42,409.45)
  BOT w5: R14_1.1@443.9,440.94 456.69,440.94 U1.0@472.44,448.82
  BOT w6: U4_1.4@347.64,477.56 U1.0@375,450.2
  BOT w20: v2@148.4,157.01 ccw(c300,500) v2(640.58,343.05) ; v2@148.95,157.48 v2(148.95,335.83) cw(c600,500) v2@148.95,664.17 ; v2@149.96,664.17 v2(149.96,838.58) ; v2(234.88,869.31) cw(c300,500) v2(334.59,873.41) ; v2(525,800) cw(c300,500) v2(640.23,657.7) ; v1@1049.84,50 v1@1248.43,50 ; v1@1049.84,150 v1@1248.43,150 ; v1@1049.84,250 v1@1248.43,250 ; v1@1049.84,350 v1@1248.43,350 ; v1@1049.84,450 v1@1248.43,450 ; v1@1049.84,550 v1@1248.43,550 ; v1@1049.84,650 v1@1248.43,650 ; v1@1049.84,750 v1@1248.43,750 ; v1@1049.84,850 v1@1248.43,850 ; v1@1049.84,950 v1@1248.43,950 ; v1(1050,50) v1(1050,950) ; v1(1150,50) v1(1150,950) ; v1(1250,50) v1(1250,950) ; v1@1548.02,247.44 1850,247.44 v1@1850,50.36 ; v1@1548.85,650 1747.44,650 v1@1747.44,949.18 ; v1@1549.59,550 1649.02,550 ; v1@1549.61,850.26 2148.02,850.26 ; v1(1550,50) v1(1550,950) ; v1@1550.57,450 1650,450 ; v1@1550.82,351 1749.41,351 1749.41,251.58 ; v1@1649.02,49.18 1649.02,650 ; 1649.02,850 v1@1649.02,949.18 ; 1749.41,750.59 1848.84,750.59 ; 1848.82,750.59 v1@1848.82,949.18 ; 1851.59,150 v1(2450,150) ; v1@1949.21,49.18 1949.21,144.67 ; 1949.21,853.69 v1@1949.21,949.18 ; v1@2048.62,49.18 2048.62,144.67 ; 2048.62,853.69 v1@2048.62,949.18 ; v1@2148.02,49.18 2148.02,248.62 2248.43,248.62 ; v1@2148.02,949.18 2148.02,751.35 v1@2450,751.35 ; v1(2250,50) 2250,351.59 v1@2451.57,351.59 ; 2250,650.57 2250,750 ; 2251.41,649.97 v1(2450,650) ; v1@2349.02,49.17 2349.02,148.59 ; 2349.02,350.77 v1@2349.02,949.18 ; 2350,450 v1@2449.43,450 ; 2350.57,850 v1(2450,850) ; 2350.59,549.58 v1@2450.02,549.58 ; v1@2749.84,50 v1@2948.43,50 ; v1@2749.84,150 v1@2948.43,150 ; v1@2749.84,250 v1@2948.43,250 ; v1@2749.84,350 v1@2948.43,350 ; v1@2749.84,450 v1@2948.43,450 ; v1@2749.84,550 v1@2948.43,550 ; v1@2749.84,650 v1@2948.43,650 ; v1@2749.84,750 v1@2948.43,750 ; v1@2749.84,850 v1@2948.43,850 ; v1@2749.84,950 v1@2948.43,950
  BOT w22: v1(1550,50) v1(2450,50) v1(2450,950) v1(1550,950) ; v1(2750,50) v1(2750,950) ; v1(2850,50) v1(2850,950) ; v1(2950,50) v1(2950,950)
  other v1: 1650,50 1750,50 1850,50 1950,50 2050,50 2150,50 2350,50 1050,150 1150,150 1250,150 1550,150 2750,150 2850,150 2950,150 1050,250 1150,250 1250,250 1550,250 2450,250 2750,250 2850,250 2950,250 1050,350 1150,350 1250,350 1550,350 2450,350 2750,350 2850,350 2950,350 1050,450 1150,450 1250,450 1550,450 2450,450 2750,450 2850,450 2950,450 1050,550 1150,550 1250,550 1550,550 2450,550 2750,550 2850,550 2950,550 1050,650 1150,650 1250,650 1550,650 2750,650 2850,650 2950,650 1050,750 1150,750 1250,750 1550,750 2450,750 2750,750 2850,750 2950,750 1050,850 1150,850 1250,850 1550,850 2750,850 2850,850 2950,850 1650,950 1750,950 1850,950 1950,950 2050,950 2150,950 2250,950 2350,950
  other v2: 279.53,125.98 440.94,153.54 149.65,205.32 570.87,240.16 149.61,244.09 136,378 127,420 218.31,450 122,460 120,500 122,540 127,580 136,622 150,662.01 150,701.38 150,740.75 149.96,779.53 338.58,840.06
  other v3: 1375,50 2625,50 1375,200 2625,200 1375,350 2625,350 1375,500 2625,500 1375,650 2625,650 205.91,779.53 1375,800 2625,800 1375,950 2625,950
  other v4: 1853.74,318.5 1817.32,354.92 2181.5,645.28 1817.32,646.26 2146.06,680.71 1854.92,682.68
  other v6: 2000,500
GPS_CS: U1.19 | length 23.6
  TOP w5: U1.19@417.13,618.11 v2(417.13,641.73)
GPS_EN: Q2.5 R15.2 U1.21 | length 23.6
  TOP w5: U1.21@385.63,618.11 v2(385.63,641.73)
GPS_INT: U1.17 | length 23.6
  TOP w5: U1.17@448.62,618.11 v2(448.62,641.73)
GPS_NCS: 
HR_PWM: U1.27 | length 51.2
  TOP w5: v2(255.71,555.12) U1.27@306.89,555.12
  other v2: 255.71,555.12
HR_PWM2: U1.25 | length 51.2
  TOP w5: v2(255.71,586.61) U1.25@306.89,586.61
  other v2: 255.71,586.61
IMU_CS: J1.18 R28.1 U1.22 U5.22 | length 1925.9
  TOP w5: R28.1@250.98,614.17 v2(271.65,614.17) ; U5.22@313.98,748.03 342.52,748.03 374.02,779.53 v2(375,779.53) ; U1.22@369.88,618.11 v2(369.88,669.29)
  TOP w6: v2(677.17,716.54) 952.76,716.54 1016,653.29 v2(1016,94.49)
  SIG w5: v2(271.65,614.17) 354.33,614.17 369.88,629.72 v2(369.88,669.29) ; 354.33,684.84 v2(369.88,669.29) ; v2(677.17,716.54) 641.73,716.54 625.98,732.28 523.62,732.28 492.13,763.78 448.82,763.78 433.07,779.53 v2(375,779.53) 338.58,743.11 338.58,700.59 v2(369.88,669.29) ; v2@1015.75,94.49 1039.37,70.87 1064.06,70.87 1084.92,50 1111.42,50 1161.42,100 J1.18@1200,100
IMU_INT: U1.14 U5.12 | length 309.4
  TOP w5: U1.14@495.87,618.11 v2(495.87,669.29)
  TOP w6: U5.12@444.29,794.68 452.76,803.15 v2(452.76,822.83)
  BOT w6: v2(452.76,822.83) 437.01,822.83 425.2,811.02 425.2,716.54 437.01,704.72 476.38,704.72 495.87,685.24 v2(495.87,669.29)
IMU_MISO: J1.16 U1.16 U4.2 U4_1.2 U5.9 | length 1582.7
  TOP w5: U5.9@437.99,747.44 438.58,748.03 476.38,748.03 492.13,732.28 492.13,712.6 464.57,685.04 v2@464.57,669.29 ; U1.16@464.37,618.11 v2(464.37,669.29)
  TOP w6: v2(766.73,677.17) 783.46,660.43 783.46,614.17 824.21,573.43 824.21,478.94 913.39,389.76 913.39,295.28 964.57,244.09 v2@964.57,169.51
  SIG w5: v2(464.37,669.29) 464.37,684.84 476.38,696.85 574.8,696.85 637.8,633.86 723.43,633.86 v2(766.73,677.17) ; v2(964.57,170) 1064.92,170 1084.92,150 1111.42,150 1161.42,200 J1.16@1200,200
  BOT w5: U4_1.2@450,500 450,583.86 464.12,597.98 464.12,669.04 v2(464.37,669.29)
IMU_MOSI: J1.17 U1.18 U4.5 U4_1.5 U5.24 | length 1393.5
  TOP w5: U5.24@313.98,716.53 350.39,716.53 358.27,724.41 v2(375,724.41) ; U1.18@432.87,618.11 v2@432.87,671.26
  TOP w6: v2(661.42,677.17) 681.1,657.48 681.1,614.17 704.72,590.55 704.72,362.2 724.41,342.52 U4.5@724.41,282.68 ; U4.5@724.21,282.48 724.21,240.35 759.84,204.72 893.7,204.72 v2(930.75,167.68)
  SIG w5: v2@376.38,725.79 v2(432.87,669.29) ; v2@432.87,671.26 470.28,708.66 602.36,708.66 633.86,677.17 v2(661.42,677.17) ; v2(930.75,167.68) 952.76,145.67 1007.87,145.67 1053.54,100 J1.17@1100,100
  BOT w5: U4_1.5@350,749.02 350,736.61 362.2,724.41 v2(375,724.41)
IMU_NCS: 
IMU_SCLK: J1.15 U1.20 U4.6 U4_1.6 U5.23 | length 1916
  TOP w5: U5.23@313.98,732.28 346.46,732.28 364.17,750 v2(400,750) ; U1.20@401.38,618.11 v2(401.38,669.29)
  TOP w6: v2@731.3,675.69 750.98,695.37 945.87,695.37 992.13,649.11 v2(992.13,200.79) ; v2(731.3,676.18) 716.54,661.42 716.54,602.36 748.03,570.87 748.03,381.89 774.41,355.51 U4.6@774.41,282.68
  SIG w5: 354.23,716.44 v2(401.38,669.29) ; 354.33,716.54 354.33,736.22 368.11,750 v2(400,750) 486.22,750 515.75,720.47 614.17,720.47 637.8,696.85 710.63,696.85 v2(731.3,676.18) ; v2@988.19,200 J1.15@1100,200
MISO: 
MOSI: 
NBAT_STS: 
NBATT_CHARGE1: 
NetC19_2: C19.2 U5.10 | length 86.4
  TOP w5: U5.10@437.99,763.78 476.38,763.78 C19.2@510.33,729.82
NetC52_1: 
NetR4_2: 
NetR14_2: 
NetR19_1: 
NetU1_D9: 
NetU1_E9: 
NetU6_2: U6.2 U6.9 | length 37.3
  TOP w10: U6.9@759.84,837.28 774.61,822.52 U6.2@774.61,806.1
NetU7_2: U7.2 U7.9 | length 37.3
  TOP w10: U7.2@837.36,184.25 837.36,167.83 U7.9@852.13,153.07
NGG_INT: U1.40 | length 23.6
  TOP w5: v2(385.63,358.27) U1.40@385.63,381.89
NRESET: U18.1
OUT_EN1: Q2.2 R13.2
OUTPUT1: Q2.6
OUTPUT2: Q2.3
RTC_CLK: RTC0.2 U1.43 | length 138
  TOP w5: RTC0.2@431.1,257.87 448.82,275.59 448.82,314.76 v2(432.87,330.71) U1.43@432.87,381.89
RTC_INT: RTC0.6 U1.47 | length 96.1
  TOP w5: RTC0.6@466.54,293.31 v2@494.09,328.74 ; v2(495.87,330.71) U1.47@495.87,381.89
RTC_INT#: 